# Altium PCB TP_Charger.PcbDoc
Units mil, origin at the board's own origin, x right, y up, seen from the top; angles counter-clockwise.
Board outline 600 x 510 mil, 2 copper layers (Top Layer, Bottom Layer); 12 components, 10 nets, 38 pads, 20 vias.
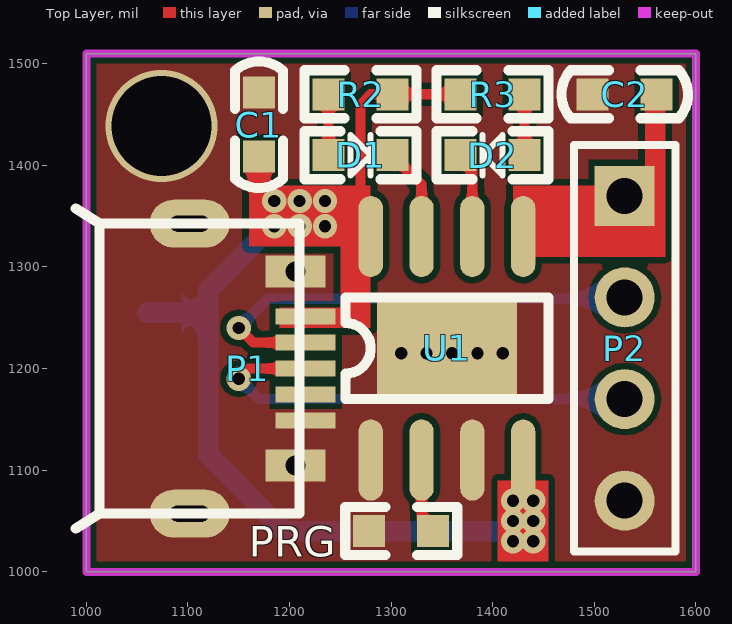
[diagram p0: Top Layer view]
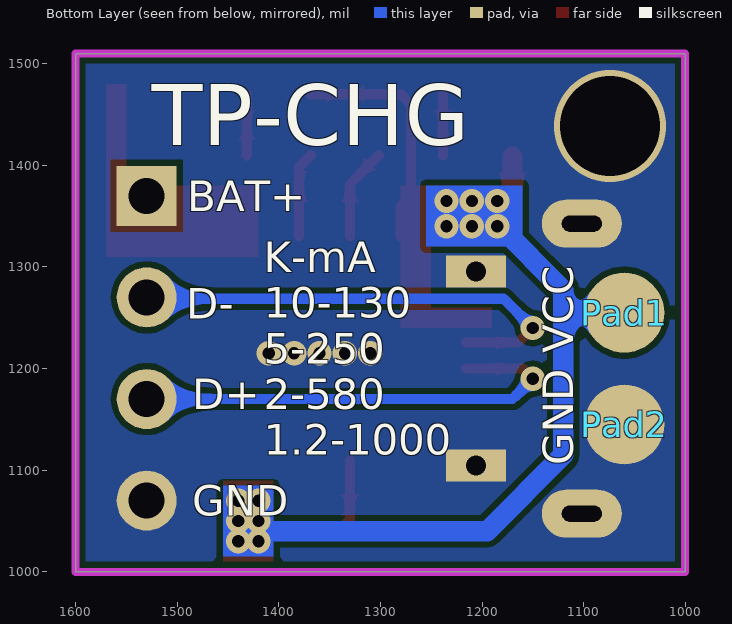
[diagram p1: Bottom Layer view, seen from below]
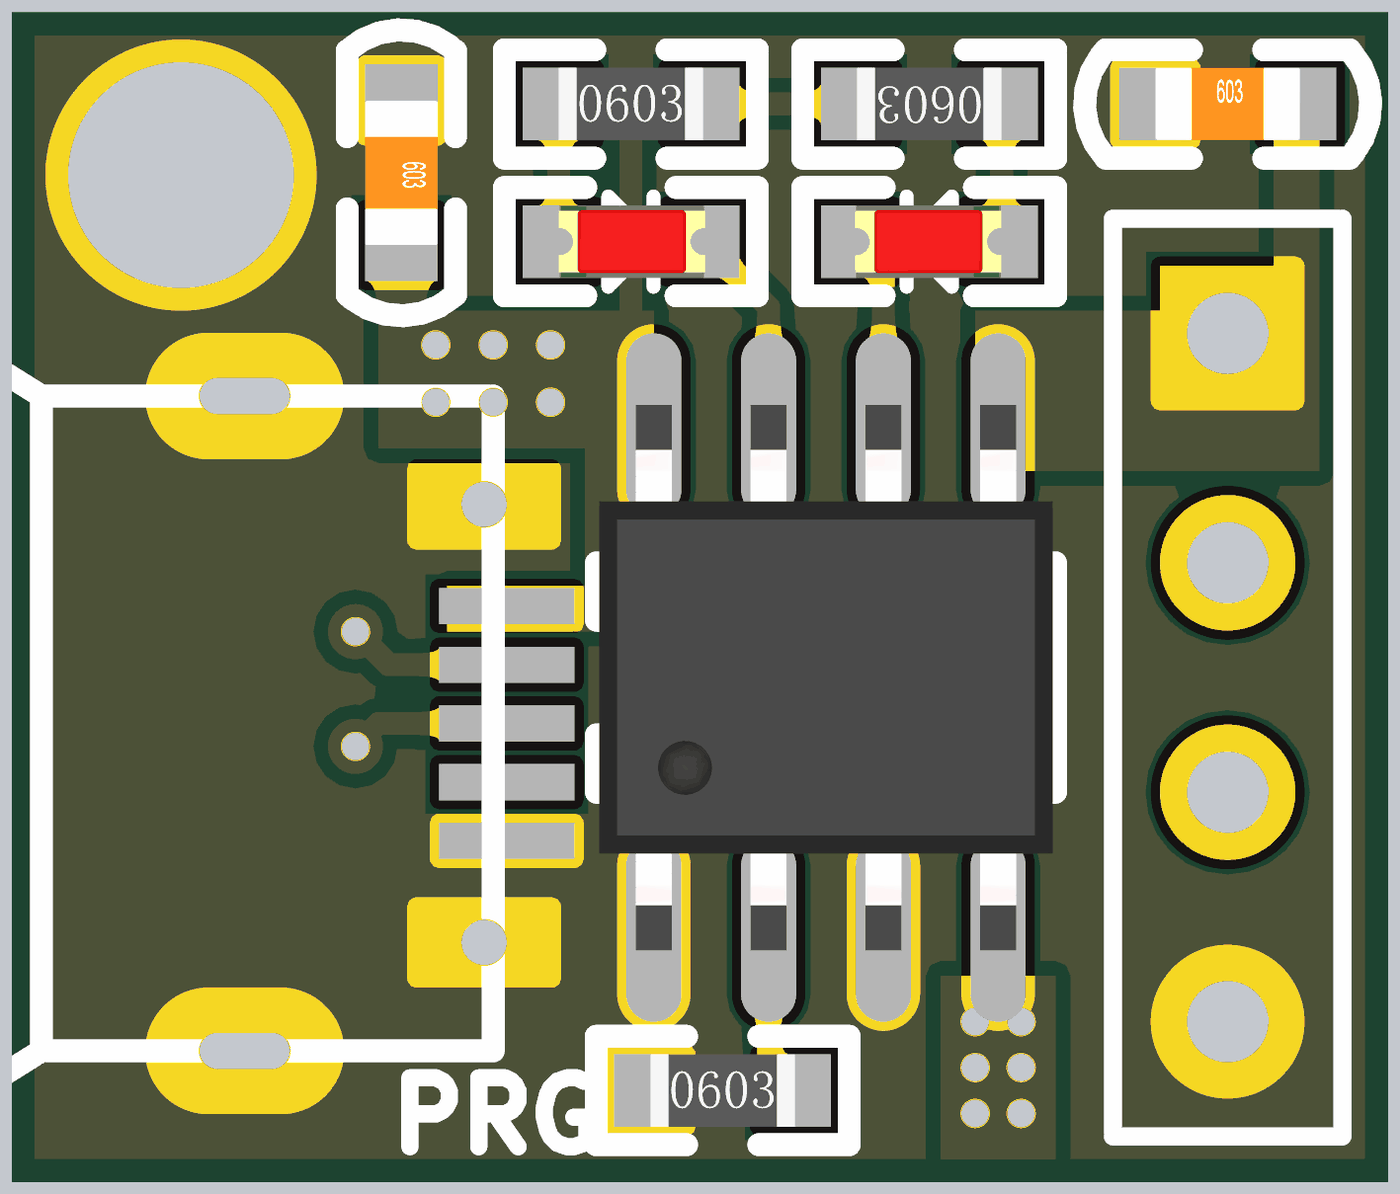
[diagram p2: 3D render of the assembled board from above, using the file's embedded part models]

## Layer stack, top to bottom
Top Solder: solder mask 0.4, Solder Resist, Dk 3.5
Top Layer: signal copper 1.4
Dielectric 1: dielectric 12.6, FR-4, Dk 4.8
Bottom Layer: signal copper 1.4
Bottom Solder: solder mask 0.4, Solder Resist, Dk 3.5

## Board outline
1000,1000 1600,1000 1600,1510 1000,1510

## Design rules (kind name [scope] priority, off if disabled: settings)
Clearance [All] p1: gap=6
HoleSize [All] p1 off: absolutevalues=TRUE maxlimit=100 minlimit=1 maxpercent=80.000 minpercent=20.000
HoleToHoleClearance [All] p1 off: gap=10 allowstackedmicrovias=TRUE
LayerPairs [All] p1 off: enforce=TRUE
MinimumSolderMaskSliver [All] p1 off: minsoldermaskwidth=10
NetAntennae [All] p1 off: netantennaetolerance=0
PlaneConnect [All] p1: planeconnectstyle=Direct reliefexpansion=20 reliefentries=4 reliefconductorwidth=10 reliefairgap=10
PolygonConnect [All] p1: connectstyle=Direct reliefconductorwidth=10 reliefentries=4 polygonreliefangle="90 Angle" airgapwidth=10
RoutingVias [All] p1: holewidth=12 width=24 viastyle="Through Hole" minholewidth=12 minwidth=24 maxholewidth=200 maxwidth=200
SilkToSilkClearance [All] p1 off: silktosilkclearance=10
SilkToSolderMaskClearance [IsPad] p1 off: minsilkscreentomaskgap=10 clearancetoexposedcopper=TRUE
SolderMaskExpansion [All] p1: expansion=4
Width [All] p1: maxlimit=100 minlimit=6 preferedwidth=10
22 further rules are at their usual default settings.

## Components (designator, comment, footprint, x,y, rotation, side; value= is the part's Value field where it differs from the comment)
C1 "10uf" 电容_C0603 1170,1440 r270 top
C2 "10uf" 电容_C0603 1530,1470 r0 top
D1 "red" LED_0603 1270,1410 r0 top
D2 "green" LED_0603 1400,1410 r180 top
P1 "MICRO USB" "接插件_MICRO 牛角插座 USB 卷边" 1210,1200 r90 top
P2 "Header 4" HDR1X4 1530,1370 r270 top
Pad1 "VCC" Pad_B 1060,1255 r90 bottom
Pad2 "GND" Pad_B 1060,1145 r90 bottom
PRG "2k" 电阻_R0603 1310,1040 r0 top (schematic designator R1)
R2 "1K" 电阻_R0603 1270,1470 r0 top
R3 "2k" 电阻_R0603 1400,1470 r180 top
U1 "TP4056" 充电芯片_HSOP8 1280,1110 r90 top

## Footprints (in the part's own frame and the unit in brackets; to place one, negate y for a bottom-side part, rotate by r counter-clockwise, add the part's x,y. Pads: shape width x height; smd on the part's side, far side on the other; paste and mask are expansions set on the pad)
HDR1X4 [mm] "Connector; Header; 4 Position"
  rect 1.5x1.5 hole 0.9: 1(0,0)
  round 1.5 hole 0.9: 2(2.54,0) 3(5.08,0) 4(7.62,0)
  silkscreen extent -1.27,-1.27 8.89,1.27
LED_0603 [mm]
  rect 0.8x0.8 smd: A(-0.8,0) K(0.8,0)
  silkscreen extent -1.4,-0.6 1.4,0.6, body extent -0.8,-0.4 0.82,0.4, height 0.6
Pad_B [mm]
  round 2 smd: 1(0,0)
充电芯片_HSOP8 [mil]
  rect 98.43x137.8 smd: 0(110,-75)
  oval 80x24 smd: 1(0,0) 2(0,-50) 3(0,-100) 4(0,-150) 5(220,-150) 6(220,-100) 7(220,-50) 8(220,0)
  silkscreen extent 60,-175 160,25, body extent -9,-174 229,24, height 63
"接插件_MICRO 牛角插座 USB 卷边" [mm]
  oval 1.2x2 hole 0.4 slot 1 at 90 deg: 0(-3.625,2.75) 0(3.625,2.75)
  rect 0.8x1.5 hole 0.5: 0(-2.425,0.1) 0(2.425,0.1)
  rect 0.4x1.5 smd: 1(1.3,-0.15) 2(0.65,-0.15) 3(0,-0.15) 4(-0.65,-0.15) 5(-1.3,-0.15)
  silkscreen extent -4,0 4,5.6
电容_C0603 [mm]
  rect 0.8x0.8 smd: 1(-0.8,0) 2(0.8,0)
  silkscreen extent -1.58,-0.6 1.58,0.6, body extent -0.8,-0.4 0.8,0.4, height 0.3
电阻_R0603 [mm]
  rect 0.8x0.8 smd: 1(-0.8,0) 2(0.8,0)
  silkscreen extent -1.4,-0.6 1.4,0.6, body extent -0.8,-0.4 0.8,0.4, height 0.45

## Part data
C1 C2: library part cap
D1 D2: library part LED
P1: library part "MICRO USB 5PIN"
P2: "Header, 4-Pin"
Pad1 Pad2: library part Pad
PRG R2 R3: library part Res

## Via types
v1: diameter 24, hole 12, Top Layer to Bottom Layer, tented both sides, 19 vias
v2: diameter 110.24, hole 98.43, Top Layer to Bottom Layer, 1 vias

## Nets (pads, with @x,y where several pads share a name; then routed paths per layer and width w, separated by ;. In a path a pad name is that pad's centre, name@x,y a point inside that pad or via, vN(x,y) a via of type N, cw(c..) or ccw(c..) an arc to the next point about the centre after c; other vN are vias at no path point)
BAT_IN: C2.2 P2.1 U1.5
GND: C1.1 C2.1 P1.0 P1.5 P2.4 Pad2.1 PRG.1 U1.0 U1.1 U1.3
  other v1: 1310,1215 1335,1215 1360,1215 1385,1215 1410,1215
  other v2: 1074,1439
NetD1_A: D1.A R2.1 | length 60
  Top Layer w10: D1.A R2.1
NetD1_K: D1.K U1.7 | length 91.8
  Top Layer w10: D1.K 1330,1381.5 U1.7
NetD2_A: D2.A R3.1 | length 60
  Top Layer w10: D2.A R3.1
NetD2_K: D2.K U1.6 | length 84.8
  Top Layer w10: D2.K 1380,1398.5 U1.6
NetR1_2: PRG.2 U1.2 | length 74.8
  Top Layer w10: U1.2 1330,1051.5 PRG.2
USB_D+: P1.3 P2.3 | length 458.3
  Top Layer w10: v1(1150,1190) 1160,1200 P1.3
  Bottom Layer w10: v1(1150,1190) 1170,1170 P2.3
USB_D-: P1.2 P2.2 | length 464.3
  Top Layer w10: v1(1150,1240) 1164.41,1225.59 P1.2
  Bottom Layer w10: v1(1150,1240) 1178.72,1268.72 1528.72,1268.72 P2.2
USB_VCC: C1.2 P1.1 Pad1.1 R2.2 R3.2 U1.4 U1.8 | length 939.6
  Top Layer w10: U1.8 1280,1360 1270,1370 1270,1460 1280,1470 R2.2 R3.2
  Top Layer w20: 1170,1360 C1.2
  Bottom Layer w20: Pad1.1 1120,1255 ; v1(1185,1340) 1182.69,1340 1120,1277.31 1120,1255 ; 1430,1040 1195,1040 1120,1115 1120,1255
  other v1: 1420,1030 1440,1030 1420,1050 1440,1050 1420,1070 1440,1070 1210,1340 1235,1340 1185,1365 1210,1365 1235,1365
pads on no net: P1.4

## Polygon pours and split planes (outlines as drawn)
GND on Top Layer "GND" (solid, remove dead copper, pour order 0): 945,1560 955,1550 1650,1550 1650,885 1600,935 940,935
GND on Bottom Layer "GND" (solid, remove dead copper, pour order 2): 925,1560 1630,1560 1665,1525 1680,1510 1680,915 935,915 910,940

## Keep-outs
Keep-Out Layer:
  the board outline again, w7.87

## Other copper
Top Layer:
  rectangle net USB_VCC: 1160,1320 1280,1380
  rectangle net USB_VCC: 1250,1240 1280,1330
  rectangle net USB_VCC: 1190,1240 1280,1260
  rectangle net BAT_IN: 1550,1340 1570,1480
  rectangle net BAT_IN: 1420,1310 1570,1380
  rectangle net USB_VCC: 1405,1010 1455,1090
Bottom Layer:
  rectangle net USB_VCC: 1160,1320 1255,1380
  rectangle net USB_VCC: 1405,1015 1455,1085

## Silkscreen, mask and mechanical layers (free items; w line width, h text height)
Bottom Overlay:
  text "TP-CHG" at 1525,1420 h60
  text "BAT+" at 1490,1355 h30
  text "D-" at 1491,1249 h30
  text "VCC" at 1110,1215 h30 r270
  text "D+" at 1485,1160 h30
  text "K-mA / 10-130 / 5-250 / 2-580 / 1.2-1000" at 1415,1115 h30
  text "GND" at 1110,1105 h30 r270
  text "GND" at 1485,1055 h30
Mechanical 1:
  the board outline again, w7.87